# Altium PCB STM32_H7XX_M.PcbDoc
Units mil, origin at the board's own origin, x right, y up, seen from the top; angles counter-clockwise.
Board outline 11240 x 7000 mil, 4 copper layers (TopLayer, GND, VCC, BottomLayer); 17 components, 0 nets, 285 pads, 0 vias.
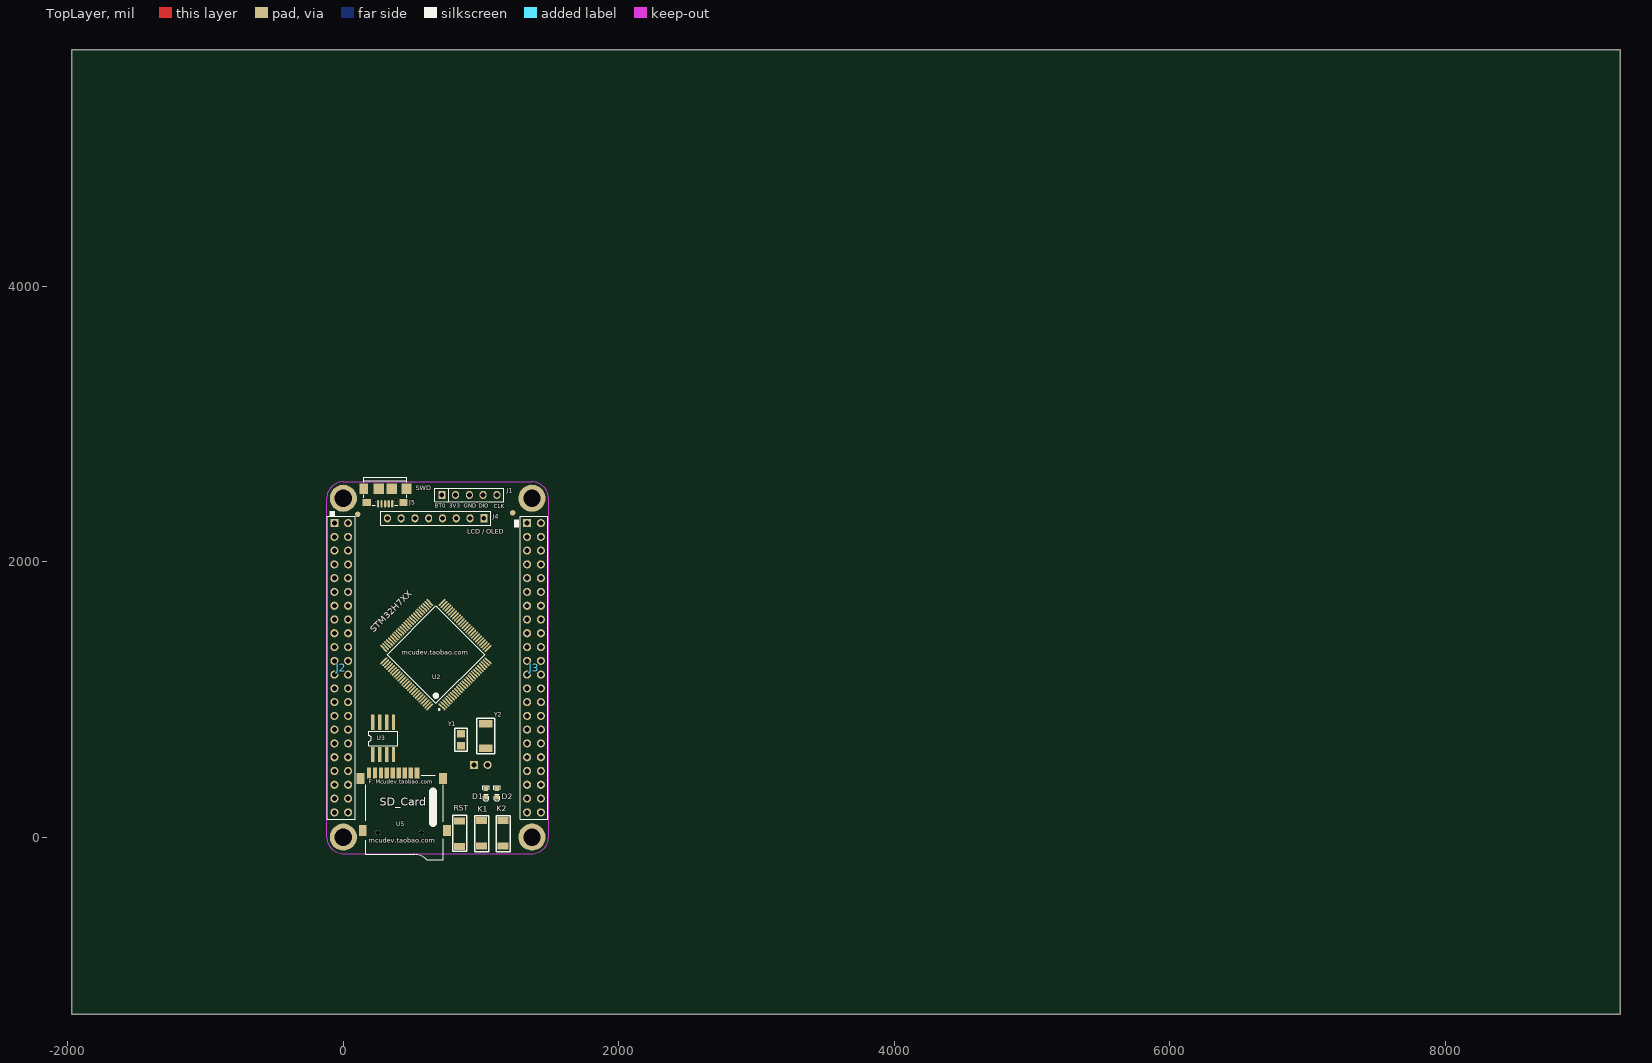
[diagram p0: TopLayer view]
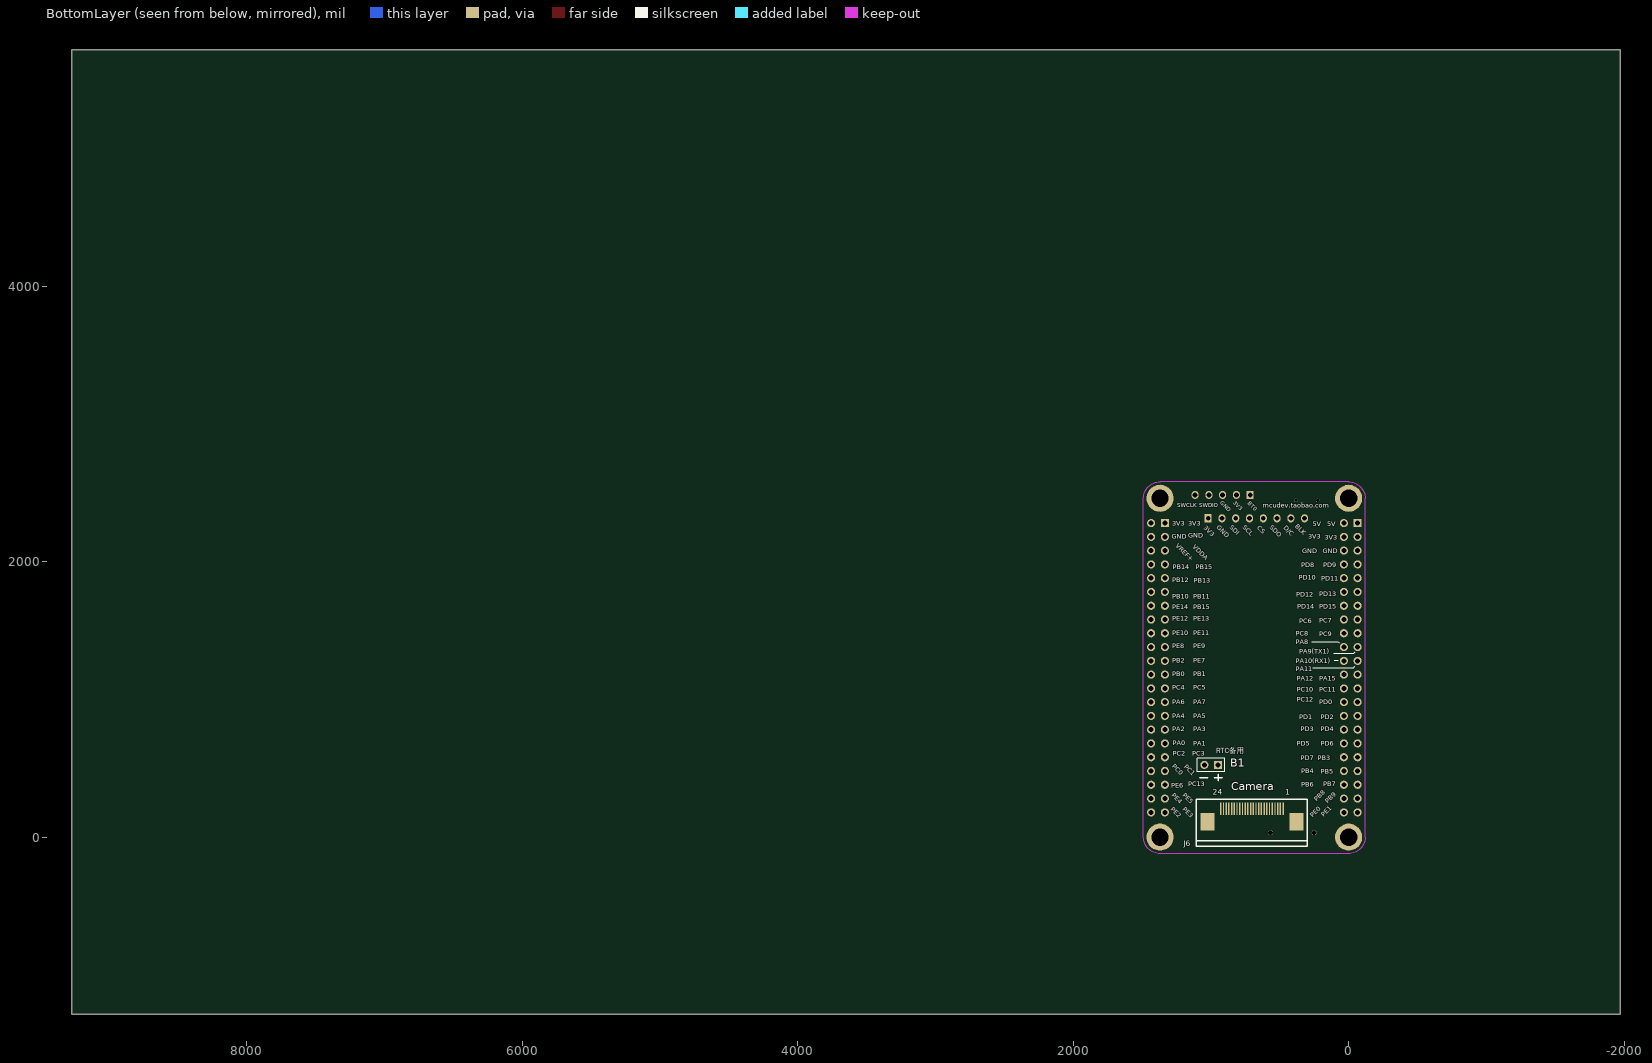
[diagram p1: BottomLayer view, seen from below]
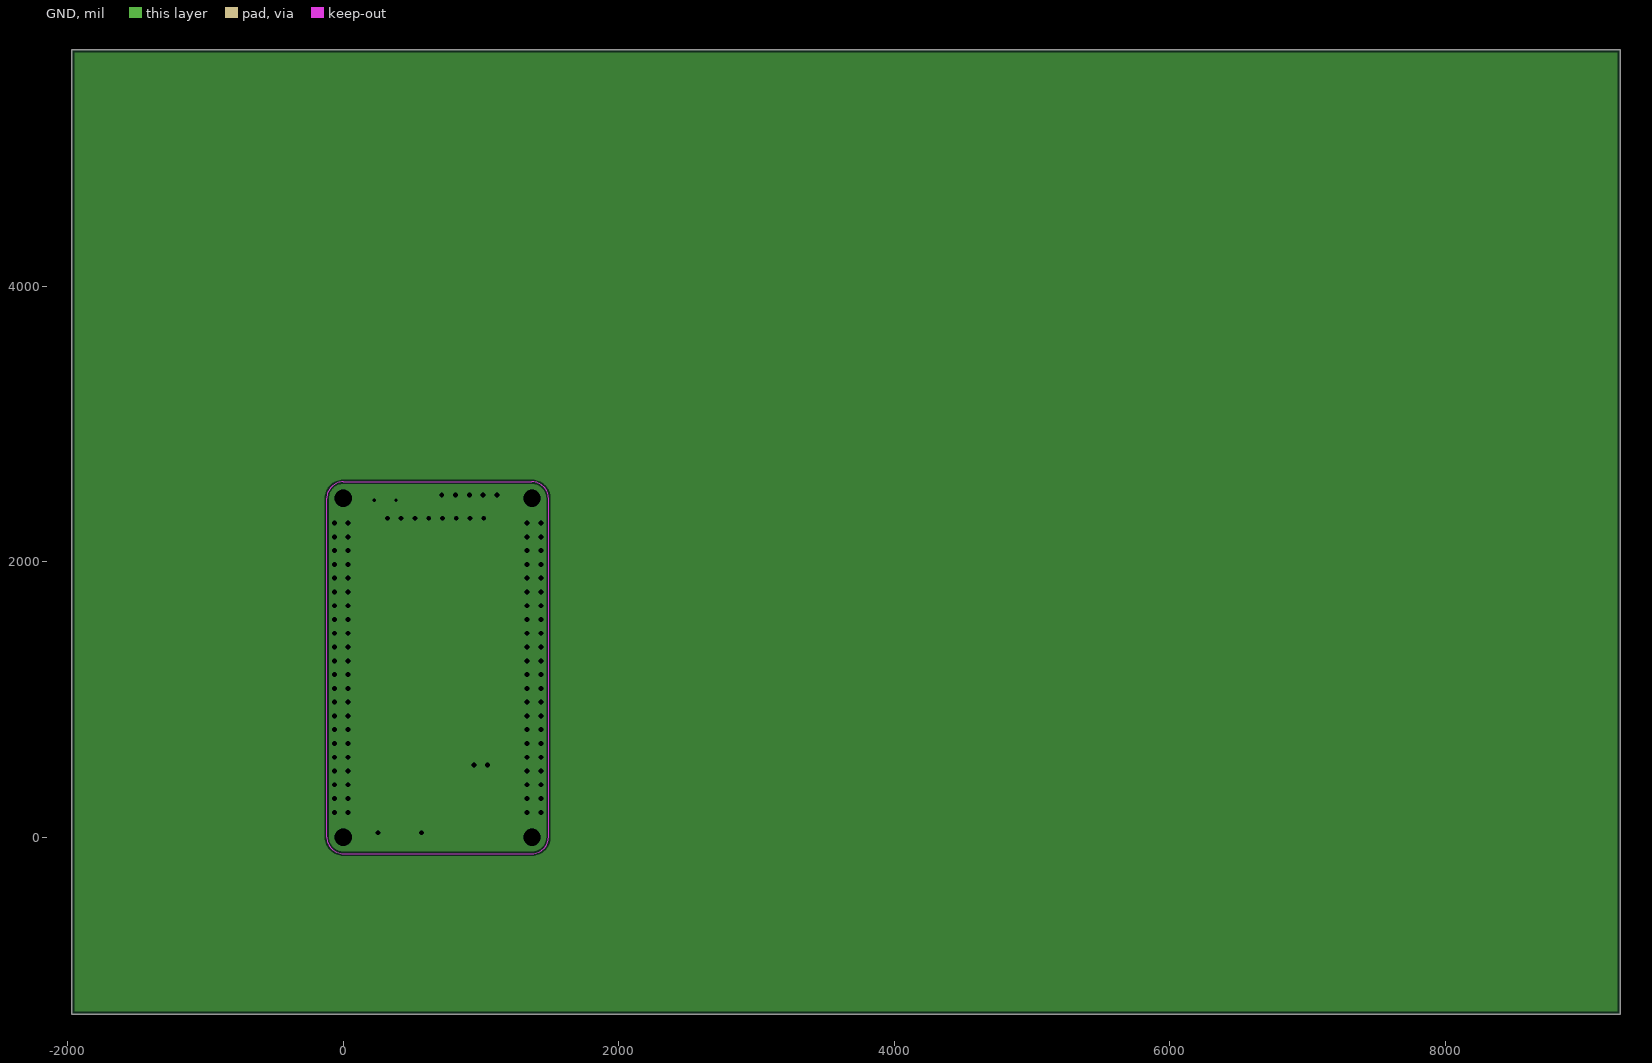
[diagram p2: GND, clearances drawn from the general rule]

## Layer stack, top to bottom
TopLayer: signal copper 1.4
Dielectric: core 12.6, FR-4, Dk 4.8
GND: plane copper 1.4
Dielectric: prepreg 12.6, FR-4, Dk 4.8
VCC: signal copper 1.4
Dielectric: core 12.6, FR-4, Dk 4.8
BottomLayer: signal copper 1.4

## Board outline
-1970.21,-1284.79 -1970.21,5715.21 9269.79,5715.21 9269.79,-1284.79

## Design rules (kind name [scope] priority, off if disabled: settings)
Clearance [All] p1: gap=16
ComponentClearance [All] p1: gap=1 collisioncheckmode=3 verticalgap=1 showdistances=FALSE
DiffPairsRouting DiffPairsRouting_1 [All] p2: maxlimit=10 minlimit=10 mostfreqgap=10 maxuncoupledlength=500
FabricationTestPointUsage TestPointUsage [All] p1: valid=0 allowmultiple=FALSE
FabricationTestPointUsage TestPointUsage_1 [All] p2: valid=0 allowmultiple=FALSE
FabricationTestpoint Testpoint [(IsPad And (OnTopLayer Or OnBottomLayer))] p1: side=3 testpointundercomponent=TRUE minsize=40 maxsize=100 preferedsize=60 minholesize=0 maxholesize=40 preferedholesize=32 testpointgrid=1 allowsidetop=TRUE allowsidebottom=TRUE usegrid=TRUE gridtolerance=0.01
FabricationTestpoint Testpoint_1 [(IsPad And (OnTopLayer Or OnBottomLayer))] p2: side=3 testpointundercomponent=TRUE minsize=40 maxsize=100 preferedsize=60 minholesize=20 maxholesize=40 preferedholesize=32 testpointgrid=1 allowsidetop=TRUE allowsidebottom=TRUE usegrid=TRUE gridtolerance=0.01
FanoutControl Fanout_LCC [IsLCC] p1: bgadir=Out bgaviamode=Centered fanoutstyle=Auto fanoutdirection=Alternating viagrid=1 // Fanout_LCC (Default Rule)
FanoutControl Fanout_BGA [IsBGA] p2: bgadir=Out bgaviamode=Centered fanoutstyle=Auto fanoutdirection=Alternating viagrid=1 // Fanout_BGA (Default Rule)
FanoutControl Fanout_Default [All] p4: bgadir=Out bgaviamode=Centered fanoutstyle=Auto fanoutdirection=Alternating viagrid=1 // Fanout_Default (Default Rule)
FanoutControl Fanout_Small [(CompPinCount < 5)] p5: bgadir=Out bgaviamode=Centered fanoutstyle=Auto fanoutdirection=OutThenIn viagrid=1 // Fanout_Small (Default Rule)
FanoutControl Fanout_BGA_1 [IsBGA] p6: bgadir=Out bgaviamode=Centered fanoutstyle=Auto fanoutdirection=Alternating viagrid=1 // Fanout_BGA (Default Rule)
FanoutControl Fanout_LCC_1 [IsLCC] p7: bgadir=Out bgaviamode=Centered fanoutstyle=Auto fanoutdirection=Alternating viagrid=1 // Fanout_LCC (Default Rule)
FanoutControl Fanout_SOIC_1 [IsSOIC] p8: bgadir=Out bgaviamode=Centered fanoutstyle=Auto fanoutdirection=Alternating viagrid=1 // Fanout_SOIC (Default Rule)
FanoutControl Fanout_Small_1 [(CompPinCount < 5)] p9: bgadir=Out bgaviamode=Centered fanoutstyle=Auto fanoutdirection=OutThenIn viagrid=1 // Fanout_Small (Default Rule)
FanoutControl Fanout_Default_1 [All] p10: bgadir=Out bgaviamode=Centered fanoutstyle=Auto fanoutdirection=Alternating viagrid=1 // Fanout_Default (Default Rule)
HoleSize HoleSize_1 [All] p2: absolutevalues=TRUE maxlimit=100 minlimit=1 maxpercent=80.000 minpercent=20.000
LayerPairs LayerPairs_1 [All] p2: enforce=TRUE
PasteMaskExpansion PasteMaskExpansion_1 [All] p2: expansion=0
PlaneClearance [All] p1: clearance=20
PlaneClearance PlaneClearance_1 [All] p2: clearance=0
PlaneConnect [All] p1: planeconnectstyle=Direct reliefexpansion=20 reliefentries=4 reliefconductorwidth=10 reliefairgap=10
PolygonConnect [(InPadClass('All Pads'))] p1: connectstyle=Relief reliefconductorwidth=10 reliefentries=4 polygonreliefangle="90 Angle"
PolygonConnect PolygonConnect_1 [All] p2: connectstyle=Direct reliefconductorwidth=10 reliefentries=4 polygonreliefangle="90 Angle"
RoutingLayers [All] p1: top layer_v5=TRUE mid layer 2_v5=FALSE bottom layer_v5=TRUE
RoutingPriority RoutingPriority_1 [All] p2: routingpriority=0
RoutingTopology RoutingTopology_1 [All] p2: topology=Shortest
RoutingVias [All] p1: holewidth=12 width=20 viastyle="Through Hole" minholewidth=12 minwidth=20 maxholewidth=12 maxwidth=20
ShortCircuit ShortCircuit_1 [All] p2: allowed=FALSE
SilkscreenOverComponentPads [All] p1: minsilkscreentomaskgap=10
SolderMaskExpansion [All] p1: expansion=4
SolderMaskExpansion SolderMaskExpansion_1 [All] p2: expansion=4
UnRoutedNet UnRoutedNet_1 [All] p2:
Width [All] p1: maxlimit=40 minlimit=7.87 preferedwidth=7.87 minimp=50.000000 maximp=50.000000 favimp=50.000000
17 further rules are at their usual default settings.

## Components (designator, comment, footprint, x,y, rotation, side; value= is the part's Value field where it differs from the comment)
B1 "BAT" SIP2-2.54mm 948,524 r0 bottom
D1 "LED" LED-0603 1035,349.79 r90 top
D2 "LED" LED-0603 1115,349.79 r90 top
J1 "SPI_1X5" SIP5-2.54mm 715,2484.79 r0 top
J2 "Header 22X2" IDE2X22 -65.21,2280 r270 top
J3 "Header 22X2" IDE2X22 1334.79,2280 r270 top
J4 "SIP8-2.54mm" HDR1X8 1020,2314.79 r180 top
J5 "Micro_USB" micro_USB 355,2419.79 r0 top
J6 "FPC-24P" FPC24-05MM 476,205.04 r0 bottom
K1 "Key" SW-SPST 1004,120 r270 top (schematic designator KUP)
K2 "Key" SW-SPST 1160,120 r270 top
RST "Key" SW-SPST 844,-68 r90 top
U2 "STM32H750V" LQFP100 672.19,1324.79 r135 top
U3 "W25QXX" SOP8L 215,599.79 r0 top
U5 "MiniSD" ? 535,464.79 r180 top
Y1 "32.768K" JZ3215-32K 855,749.79 r270 top
Y2 "25M" JZ5032-8M 1035,644.79 r90 top

## Footprints (in the part's own frame and the unit in brackets; to place one, negate y for a bottom-side part, rotate by r counter-clockwise, add the part's x,y. Pads: shape width x height; smd on the part's side, far side on the other; paste and mask are expansions set on the pad)
FPC24-05MM [mil]
  rect 10x90 smd: 1(0,0) 2(19.69,0) 3(39.37,0) 4(59.06,0) 5(78.74,0) 6(98.43,0) 7(118.11,0) 8(137.8,0) 9(157.48,0) 10(177.17,0) 11(196.85,0) 12(216.54,0) 13(236.22,0) 14(255.91,0) 15(275.59,0) 16(295.28,0) 17(314.96,0) 18(334.65,0) 19(354.33,0) 20(374.02,0) 21(393.7,0) 22(413.39,0) 23(433.07,0) 24(452.76,0)
  rect 100x125.98 smd: 25(549.21,92.44) 26(-96.46,92.44)
  silkscreen extent -176,-70 629,273
HDR1X8 [mm] "Connector; Header; 8 Position"
  rect 1.3x1.5 hole 0.9: 1(0,0)
  oval 1.3x1.5 hole 0.9: 2(2.54,0) 3(5.08,0) 4(7.62,0) 5(10.16,0) 6(12.7,0) 7(15.24,0) 8(17.78,0)
  silkscreen extent -1.27,-1.27 19.05,1.27
IDE2X22 [mm]
  rect 1.5x1.5 hole 0.9: 1(0,0)
  round 1.5 hole 0.9: 2(0,2.54) 3(2.54,0) 4(2.54,2.54) 5(5.08,0) 6(5.08,2.54) 7(7.62,0) 8(7.62,2.54) 9(10.16,0) 10(10.16,2.54) 11(12.7,0) 12(12.7,2.54) 13(15.24,0) 14(15.24,2.54) 15(17.78,0) 16(17.78,2.54) 17(20.32,0) 18(20.32,2.54) 19(22.86,0) 20(22.86,2.54) 21(25.4,0) 22(25.4,2.54) 23(27.94,0) 24(27.94,2.54) 25(30.48,0) 26(30.48,2.54) 27(33.02,0) 28(33.02,2.54) 29(35.56,0) 30(35.56,2.54) 31(38.1,0) 32(38.1,2.54) 33(40.64,0) 34(40.64,2.54) 35(43.18,0) 36(43.18,2.54) 37(45.72,0) 38(45.72,2.54) 39(48.26,0) 40(48.26,2.54) 41(50.8,0) 42(50.8,2.54) 43(53.34,0) 44(53.34,2.54)
  silkscreen extent -1.27,-1.27 54.61,3.81
JZ3215-32K [mm]
  rect 1.4x1.5 smd paste-0.06 mask+0.05: 1(0,0) 2(2.2,0)
  silkscreen extent -1.02,-1.14 3.18,1.14
JZ5032-8M [mm]
  rect 1.4x2.5 smd: 1(0,0) 2(4.521,0)
  silkscreen extent -1.02,-1.65 5.59,1.65
LED-0603 [mil]
  rect 32x32 smd paste+0 mask+0: 1(0,0) 2(-60,0)
  silkscreen extent -86,-22 22,22
LQFP100 [mm] "LQFP, 100-Leads, Body 16.2x16.2mm (max), Pitch 0.50mm, IPC Medium Density"
  oval 1.7x0.33 smd: 1(-7.6,6) 2(-7.6,5.5) 3(-7.6,5) 4(-7.6,4.5) 5(-7.6,4) 6(-7.6,3.5) 7(-7.6,3) 8(-7.6,2.5) 9(-7.6,2) 10(-7.6,1.5) 11(-7.6,1) 12(-7.6,0.5) 13(-7.6,0) 14(-7.6,-0.5) 15(-7.6,-1) 16(-7.6,-1.5) 17(-7.6,-2) 18(-7.6,-2.5) 19(-7.6,-3) 20(-7.6,-3.5) 21(-7.6,-4) 22(-7.6,-4.5) 23(-7.6,-5) 24(-7.6,-5.5) 25(-7.6,-6) 51(7.6,-6) 52(7.6,-5.5) 53(7.6,-5) 54(7.6,-4.5) 55(7.6,-4) 56(7.6,-3.5) 57(7.6,-3) 58(7.6,-2.5) 59(7.6,-2) 60(7.6,-1.5) 61(7.6,-1) 62(7.6,-0.5) 63(7.6,0) 64(7.6,0.5) 65(7.6,1) 66(7.6,1.5) 67(7.6,2) 68(7.6,2.5) 69(7.6,3) 70(7.6,3.5) 71(7.6,4) 72(7.6,4.5) 73(7.6,5) 74(7.6,5.5) 75(7.6,6)
  oval 0.33x1.7 smd: 26(-6,-7.6) 27(-5.5,-7.6) 28(-5,-7.6) 29(-4.5,-7.6) 30(-4,-7.6) 31(-3.5,-7.6) 32(-3,-7.6) 33(-2.5,-7.6) 34(-2,-7.6) 35(-1.5,-7.6) 36(-1,-7.6) 37(-0.5,-7.6) 38(0,-7.6) 39(0.5,-7.6) 40(1,-7.6) 41(1.5,-7.6) 42(2,-7.6) 43(2.5,-7.6) 44(3,-7.6) 45(3.5,-7.6) 46(4,-7.6) 47(4.5,-7.6) 48(5,-7.6) 49(5.5,-7.6) 50(6,-7.6) 76(6,7.6) 77(5.5,7.6) 78(5,7.6) 79(4.5,7.6) 80(4,7.6) 81(3.5,7.6) 82(3,7.6) 83(2.5,7.6) 84(2,7.6) 85(1.5,7.6) 86(1,7.6) 87(0.5,7.6) 88(0,7.6) 89(-0.5,7.6) 90(-1,7.6) 91(-1.5,7.6) 92(-2,7.6) 93(-2.5,7.6) 94(-3,7.6) 95(-3.5,7.6) 96(-4,7.6) 97(-4.5,7.6) 98(-5,7.6) 99(-5.5,7.6) 100(-6,7.6)
  silkscreen extent -7.72,-6.35 6.35,6.85, body extent -7.05,-7.05 7.05,7.05, height 1.6
micro_USB [mm]
  oval 0.4x1.35 smd: 1(0,0) 2(-0.65,0) 3(-1.3,0) 4(-1.95,0) 5(-2.6,0)
  rect 1.651x1.9 smd: 6(-5.25,2.794)
  rect 1.5x1.3 smd: 6(-4.699,0.254) 9(2.099,0.254)
  rect 1.9x1.9 smd: 7(-2.5,2.794) 8(-0.1,2.794) 9(2.65,2.794)
  round 0.6 hole 0.6: ""(-3.3,0.644) ""(0.7,0.644)
  silkscreen extent -5.25,-0.25 2.65,4.94
SIP2-2.54mm [mm]
  rect 1.5x1.5 hole 0.9: 1(0,0)
  round 1.5 hole 0.9: 2(2.54,0)
  silkscreen extent -1.27,-1.27 3.81,1.27
SIP5-2.54mm [mm]
  rect 1.3x1.5 hole 0.9: 1(0,0)
  oval 1.3x1.5 hole 0.9: 2(2.54,0) 3(5.08,0) 4(7.62,0) 5(10.16,0)
  silkscreen extent -1.27,-1.27 11.43,1.27
SOP8L [mil]
  rect 24x110 smd: 1(-0.41,-0.3) 2(49.59,-0.3) 3(99.59,-0.3) 4(149.59,-0.3) 5(149.59,234.7) 6(99.59,234.7) 7(49.59,234.7) 8(-0.41,234.7)
  silkscreen extent -30,65 180,170
SW-SPST [mm]
  rect 1.3x2 smd paste+0 mask+0.2: 1(0,0) 2(4.7,0)
  silkscreen extent -0.89,-1.3 5.72,1.3
? [mm]
  round 0.9 hole 0.9 unplated: 0(-0.8,11) 0(7.2,11)
  rect 0.85x2 smd: 1(0,0)
  rect 0.8x2 smd: 2(1.15,0) 3(2.25,0) 4(3.35,0) 5(4.45,0) 6(5.55,0) 7(6.65,0) 8(7.75,0) 9(8.85,0)
  rect 1.5x2 smd: 10(-5.5,10.6) 11(-4.8,1) 12(10.45,1)
  rect 1.4x2 smd: 13(10,10.6)
  silkscreen extent -4.87,0.36 9.49,16

## Part data
B1: library part BATTERY
J1: library part "Header 5H", "Header, 5-Pin, Right Angle"
J2 J3: "Header, 22-Pin, Dual row"
J4: library part "Header 8", "Header, 8-Pin"
J5: library part MiniUSB
K1 K2 RST: library part SW-PB
Y1: library part CRYSTAL, "晶振"
Y2: library part CRYSTAL, "Crystal"

## Free pads (board coordinates)
  round 196.85 hole 125.98: ""(0,0) ""(0,2460) ""(1369.58,0) ""(1369.58,2460)
  round 39.37 smd: ""(104,2344) ""(1230,2354.79)

## Nets (pads, with @x,y where several pads share a name; then routed paths per layer and width w, separated by ;. In a path a pad name is that pad's centre, name@x,y a point inside that pad or via, vN(x,y) a via of type N, cw(c..) or ccw(c..) an arc to the next point about the centre after c; other vN are vias at no path point)
pads on no net: B1.1 B1.2 D1.1 D1.2 D2.1 D2.2 J1.1 J1.2 J1.3 J1.4 J1.5 J2.1 J2.2 J2.3 J2.4 J2.5 J2.6 J2.7 J2.8 J2.9 J2.10 J2.11 J2.12 J2.13 J2.14 J2.15 J2.16 J2.17 J2.18 J2.19 J2.20 J2.21 J2.22 J2.23 J2.24 J2.25 J2.26 J2.27 J2.28 J2.29 J2.30 J2.31 J2.32 J2.33 J2.34 J2.35 J2.36 J2.37 J2.38 J2.39 J2.40 J2.41 J2.42 J2.43 J2.44 J3.1 J3.2 J3.3 J3.4 J3.5 J3.6 J3.7 J3.8 J3.9 J3.10 J3.11 J3.12 J3.13 J3.14 J3.15 J3.16 J3.17 J3.18 J3.19 J3.20 J3.21 J3.22 J3.23 J3.24 J3.25 J3.26 J3.27 J3.28 J3.29 J3.30 J3.31 J3.32 J3.33 J3.34 J3.35 J3.36 J3.37 J3.38 J3.39 J3.40 J3.41 J3.42 J3.43 J3.44 J4.1 J4.2 J4.3 J4.4 J4.5 J4.6 J4.7 J4.8 J5. J5.1 J5.2 J5.3 J5.4 J5.5 J5.6 J5.7 J5.8 J5.9 J6.1 J6.2 J6.3 J6.4 J6.5 J6.6 J6.7 J6.8 J6.9 J6.10 J6.11 J6.12 J6.13 J6.14 J6.15 J6.16 J6.17 J6.18 J6.19 J6.20 J6.21 J6.22 J6.23 J6.24 J6.25 J6.26 K1.1 K1.2 K2.1 K2.2 RST.1 RST.2 U2.1 U2.2 U2.3 U2.4 U2.5 U2.6 U2.7 U2.8 U2.9 U2.10 U2.11 U2.12 U2.13 U2.14 U2.15 U2.16 U2.17 U2.18 U2.19 U2.20 U2.21 U2.22 U2.23 U2.24 U2.25 U2.26 U2.27 U2.28 U2.29 U2.30 U2.31 U2.32 U2.33 U2.34 U2.35 U2.36 U2.37 U2.38 U2.39 U2.40 U2.41 U2.42 U2.43 U2.44 U2.45 U2.46 U2.47 U2.48 U2.49 U2.50 U2.51 U2.52 U2.53 U2.54 U2.55 U2.56 U2.57 U2.58 U2.59 U2.60 U2.61 U2.62 U2.63 U2.64 U2.65 U2.66 U2.67 U2.68 U2.69 U2.70 U2.71 U2.72 U2.73 U2.74 U2.75 U2.76 U2.77 U2.78 U2.79 U2.80 U2.81 U2.82 U2.83 U2.84 U2.85 U2.86 U2.87 U2.88 U2.89 U2.90 U2.91 U2.92 U2.93 U2.94 U2.95 U2.96 U2.97 U2.98 U2.99 U2.100 U3.1 U3.2 U3.3 U3.4 U3.5 U3.6 U3.7 U3.8 U5.0 U5.1 U5.2 U5.3 U5.4 U5.5 U5.6 U5.7 U5.8 U5.9 U5.10 U5.11 U5.12 U5.13 Y1.1 Y1.2 Y2.1 Y2.2

## Polygon pours and split planes (outlines as drawn)
no net on GND (split plane): 9249.69,-1264.7 -1950.11,-1264.7 -1950.11,5695.11 9249.69,5695.11
no net on GND (split plane): 0,2564.13 1369.58,2564.13 1370.12,2564.18 1378.67,2563.81 1387.68,2562.62 1396.55,2560.66 1405.22,2557.92 1413.62,2554.44 1421.69,2550.25 1429.35,2545.36 1436.57,2539.83 1443.27,2533.69 1449.41,2526.98 1454.95,2519.77 1459.83,2512.1 1464.03,2504.04 1467.51,2495.64 1470.24,2486.97 1472.21,2478.1 1473.39,2469.08 1473.77,2460.54 1473.71,2460 1473.71,0 1473.77,-0.54 1473.39,-9.08 1472.21,-18.1 1470.24,-26.97 1467.51,-35.64 1464.03,-44.04 1459.83,-52.1 1454.95,-59.77 1449.41,-66.98 1443.27,-73.69 1436.57,-79.83 1429.35,-85.36 1421.69,-90.25 1413.62,-94.44 1405.22,-97.92 1396.55,-100.66 1387.68,-102.62 1378.67,-103.81 1370.12,-104.18 1369.58,-104.13 0,-104.13 -0.54,-104.18 -9.08,-103.81 -18.1,-102.62 -26.97,-100.66 -35.64,-97.92 -44.04,-94.44 -52.1,-90.25 -59.77,-85.36 -66.98,-79.83 -73.69,-73.69 -79.83,-66.98 -85.36,-59.77 -90.25,-52.1 -94.44,-44.04 -97.92,-35.64 -100.66,-26.97 -102.62,-18.1 -103.81,-9.08 -104.18,-0.54 -104.13,0 -104.13,2460 -104.18,2460.54 -103.81,2469.08 -102.62,2478.1 -100.66,2486.97 -97.92,2495.64 -94.44,2504.04 -90.25,2512.1 -85.36,2519.77 -79.83,2526.98 -73.69,2533.69 -66.98,2539.83 -59.77,2545.36 -52.1,2550.25 -44.04,2554.44 -35.64,2557.92 -26.97,2560.66 -18.1,2562.62 -9.08,2563.81 -0.54,2564.18

## Keep-outs
KeepOutLayer:
  lines w8: -120.21,0 ccw(c0,0) 0,-120.21 1369.58,-120.21 ccw(c1369.58,0) 1489.79,0 1489.79,2460 ccw(c1369.58,2460) 1369.58,2580.21 0,2580.21 ccw(c0,2460) -120.21,2460 -120.21,0

## Other copper
GND (plane layer: these items are gaps in the copper):
  lines w32: -120.21,0 ccw(c0,0) 0,-120.21 1369.58,-120.21 ccw(c1369.58,0) 1489.79,0 1489.79,2460 ccw(c1369.58,2460) 1369.58,2580.21 0,2580.21 ccw(c0,2460) -120.21,2460 -120.21,0

## Silkscreen, mask and mechanical layers (free items; w line width, h text height)
TopOverlay:
  rectangle: 1240,2247.79 1276,2307.79
  rectangle: -99.82,2330 -60,2367.14
  text "SWD" at 525,2504.79 h60
  text "BT0" at 665,2389.79 h28
  text "3V3" at 770,2389.79 h28
  text "GND" at 875,2389.79 h28
  text "DIO" at 985,2389.79 h28
  text "CLK" at 1091,2388.79 h28
  text "LCD / OLED" at 900,2189.92 h60
  text "STM32H7XX" at 235,1469.79 h80 r45
  text "mcudev.taobao.com" at 424,1308 h60
  text "F: Mcudev.taobao.com" at 185,374.79 h50
  text "SD_Card" at 265,205.04 h100
  text "mcudev.taobao.com" at 184,-56 h60
BottomOverlay:
  lines w8: -45,1341.79 -35,1331.79 110,1331.79 ; -42,1237.79 -32,1227.79 260,1227.79 ; 66,1405.79 76,1415.79 268,1415.79 ; 76,1279.79 104,1279.79
  lines w12: 920,432 976,432 ; 948,408 948,456 ; 1024,432 1080,432
  text "3V3" at 840,2424.79 h28 r45
  text "GND" at 935,2424.79 h28 r45
  text "BT0" at 735,2419.79 h28 r45
  text "SWDIO" at 1085,2394.79 h28
  text "SWCLK" at 1245,2394.79 h28
  text "mcudev.taobao.com" at 624,2376 h60
  text "3V3" at 1280.21,2260.21 h35
  text "3V3" at 1165,2259.79 h35
  text "5V" at 156,2255.79 h35
  text "5V" at 260,2255.79 h35
  text "BLK" at 392,2252 h34 r45
  text "SDO" at 576,2248 h34 r45
  text "SCL" at 772,2248 h34 r45
  text "SDI" at 868,2248 h34 r45
  text "GND" at 960,2248 h34 r45
  text "D/C" at 474.07,2243.97 h34 r45
  text "CS" at 668,2244 h34 r45
  text "3V3" at 1056,2244 h34 r45
  text "GND" at 1164,2171.79 h35
  text "GND" at 1284,2167.79 h35
  text "3V3" at 295,2164.79 h35
  text "3V3" at 175,2159.79 h35
  text "VREF+" at 1260,2111.79 h35 r45
  text "VDDA" at 1136,2103.79 h35 r45
  text "GND" at 190,2059.79 h35
  text "GND" at 336,2059.79 h35
  text "PD9" at 185,1959.79 h35
  text "PD8" at 344,1959.79 h35
  text "PB15" at 1112,1943.79 h35
  text "PB14" at 1276,1943.79 h35
  text "PD10" at 364,1867.79 h35
  text "PD11" at 200,1859.79 h35
  text "PB12" at 1280,1851.79 h35
  text "PB13" at 1124,1847.79 h35
  text "PD13" at 212,1747.79 h35
  text "PD12" at 380,1743.79 h35
  text "PB11" at 1128,1731.79 h35
  text "PB10" at 1280,1731.79 h35
  text "PD15" at 215,1659.79 h35
  text "PD14" at 375,1659.79 h35
  text "PB15" at 1128,1655.79 h35
  text "PE14" at 1280,1655.79 h35
  text "PE13" at 1130,1570.21 h35
  text "PE12" at 1280.21,1569.79 h35
  text "PC7" at 212,1555.79 h35
  text "PC6" at 360,1551.79 h35
  text "PE11" at 1130,1465.21 h35
  text "PE10" at 1280.21,1464.79 h35
  text "PC8" at 384,1463.79 h35
  text "PC9" at 212,1459.79 h35
  text "PA8" at 384,1399.79 h35
  text "PE9" at 1130,1370.21 h35
  text "PE8" at 1280.21,1369.79 h35
  text "PA9(TX1)" at 360,1331.79 h35
  text "PE7" at 1130,1264.79 h35
  text "PB2" at 1280.21,1264.79 h35
  text "PA10(RX1)" at 385,1261.79 h35
  text "PA11" at 384,1203.79 h35
  text "PB1" at 1130,1169.79 h35
  text "PB0" at 1280.21,1169.79 h35
  text "PA15" at 212,1136 h35
  text "PA12" at 376,1136 h35
  text "PC5" at 1130,1070.21 h35
  text "PC4" at 1280.21,1069.79 h35
  text "PC11" at 212,1055.79 h35
  text "PC10" at 376,1055.79 h35
  text "PC12" at 376,983.79 h35
  text "PA7" at 1130,964.79 h35
  text "PA6" at 1280.21,964.79 h35
  text "PD0" at 212,963.79 h35
  text "PA5" at 1130,864.79 h35
  text "PA4" at 1280.21,864.79 h35
  text "PD2" at 204,855.79 h35
  text "PD1" at 360,855.79 h35
  text "PA3" at 1130,769.79 h35
  text "PA2" at 1280.21,769.79 h35
  text "PD4" at 204,767.79 h35
  text "PD3" at 348,767.79 h35
  text "PA0" at 1276,667.79 h35
  text "PD5" at 376,664 h35
  text "PD6" at 204,663.79 h35
  text "PA1" at 1128,663.79 h35
  text "RTC备用" at 960,596 h70
  text "PC3" at 1136,591.79 h35
  text "PC2" at 1276,591.79 h35
  text "PB3" at 224,559.79 h35
  text "PD7" at 348,559.79 h35
  text "PC0" at 1284,512 h35 r45
  text "PC1" at 1196,508 h35 r45
  text "PB4" at 346.05,464.79 h35
  text "PB5" at 204,459.79 h35
  text "PB7" at 185,369.79 h35
  text "PC13" at 1164,368 h35
  text "PB6" at 346.05,364.79 h35
  text "PE6" at 1288,360 h35
  text "Camera" at 852,320 h100
  text "1" at 460,308 h40
  text "24" at 988,308 h40
  text "PE5" at 1208,300 h35 r45
  text "PE4" at 1288,300 h35 r45
  text "PB8" at 232,256 h35 r315
  text "PB9" at 152,244 h35 r315
  text "PE3" at 1208,200 h35 r45
  text "PE2" at 1296,200 h35 r45
  text "PE1" at 180,144 h35 r315
  text "PE0" at 260,140 h35 r315

## Dimensions
-120.21,0 to 1489.79,0 on TopOverlay
1369.58,-120.21 to 1369.58,2580.21 on TopOverlay